# Altium PCB ZenDriver_Mini2.PcbDoc
Units mm, origin at the board's own origin, x right, y up, seen from the top; angles counter-clockwise.
Board outline 45.85 x 53.55 mm, 2 copper layers (Top Layer, Bottom Layer); 21 components, 23 nets, 94 pads, 116 vias.
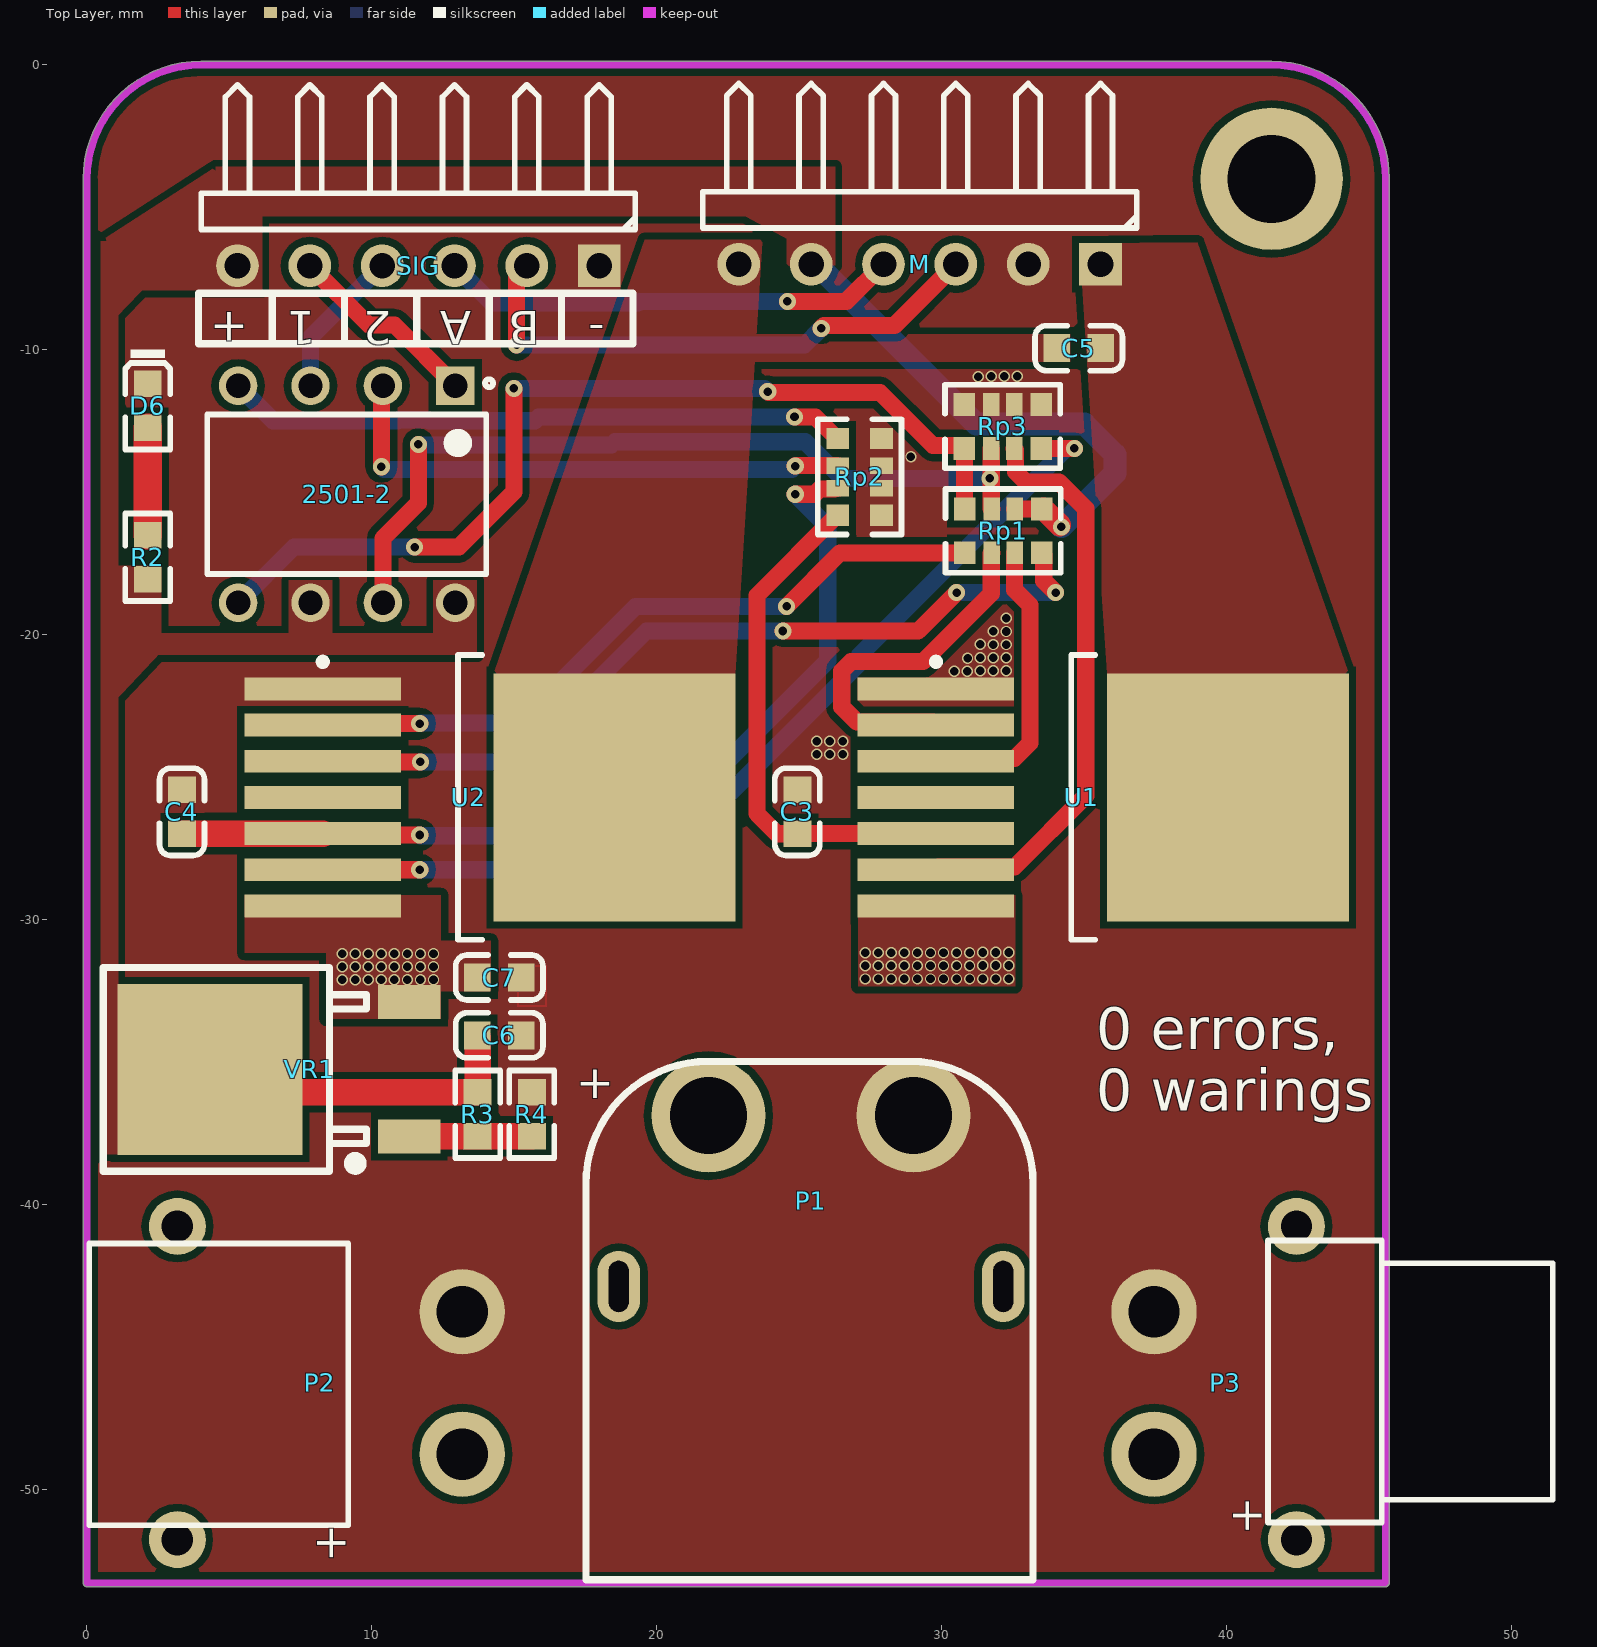
[diagram p0: Top Layer view]
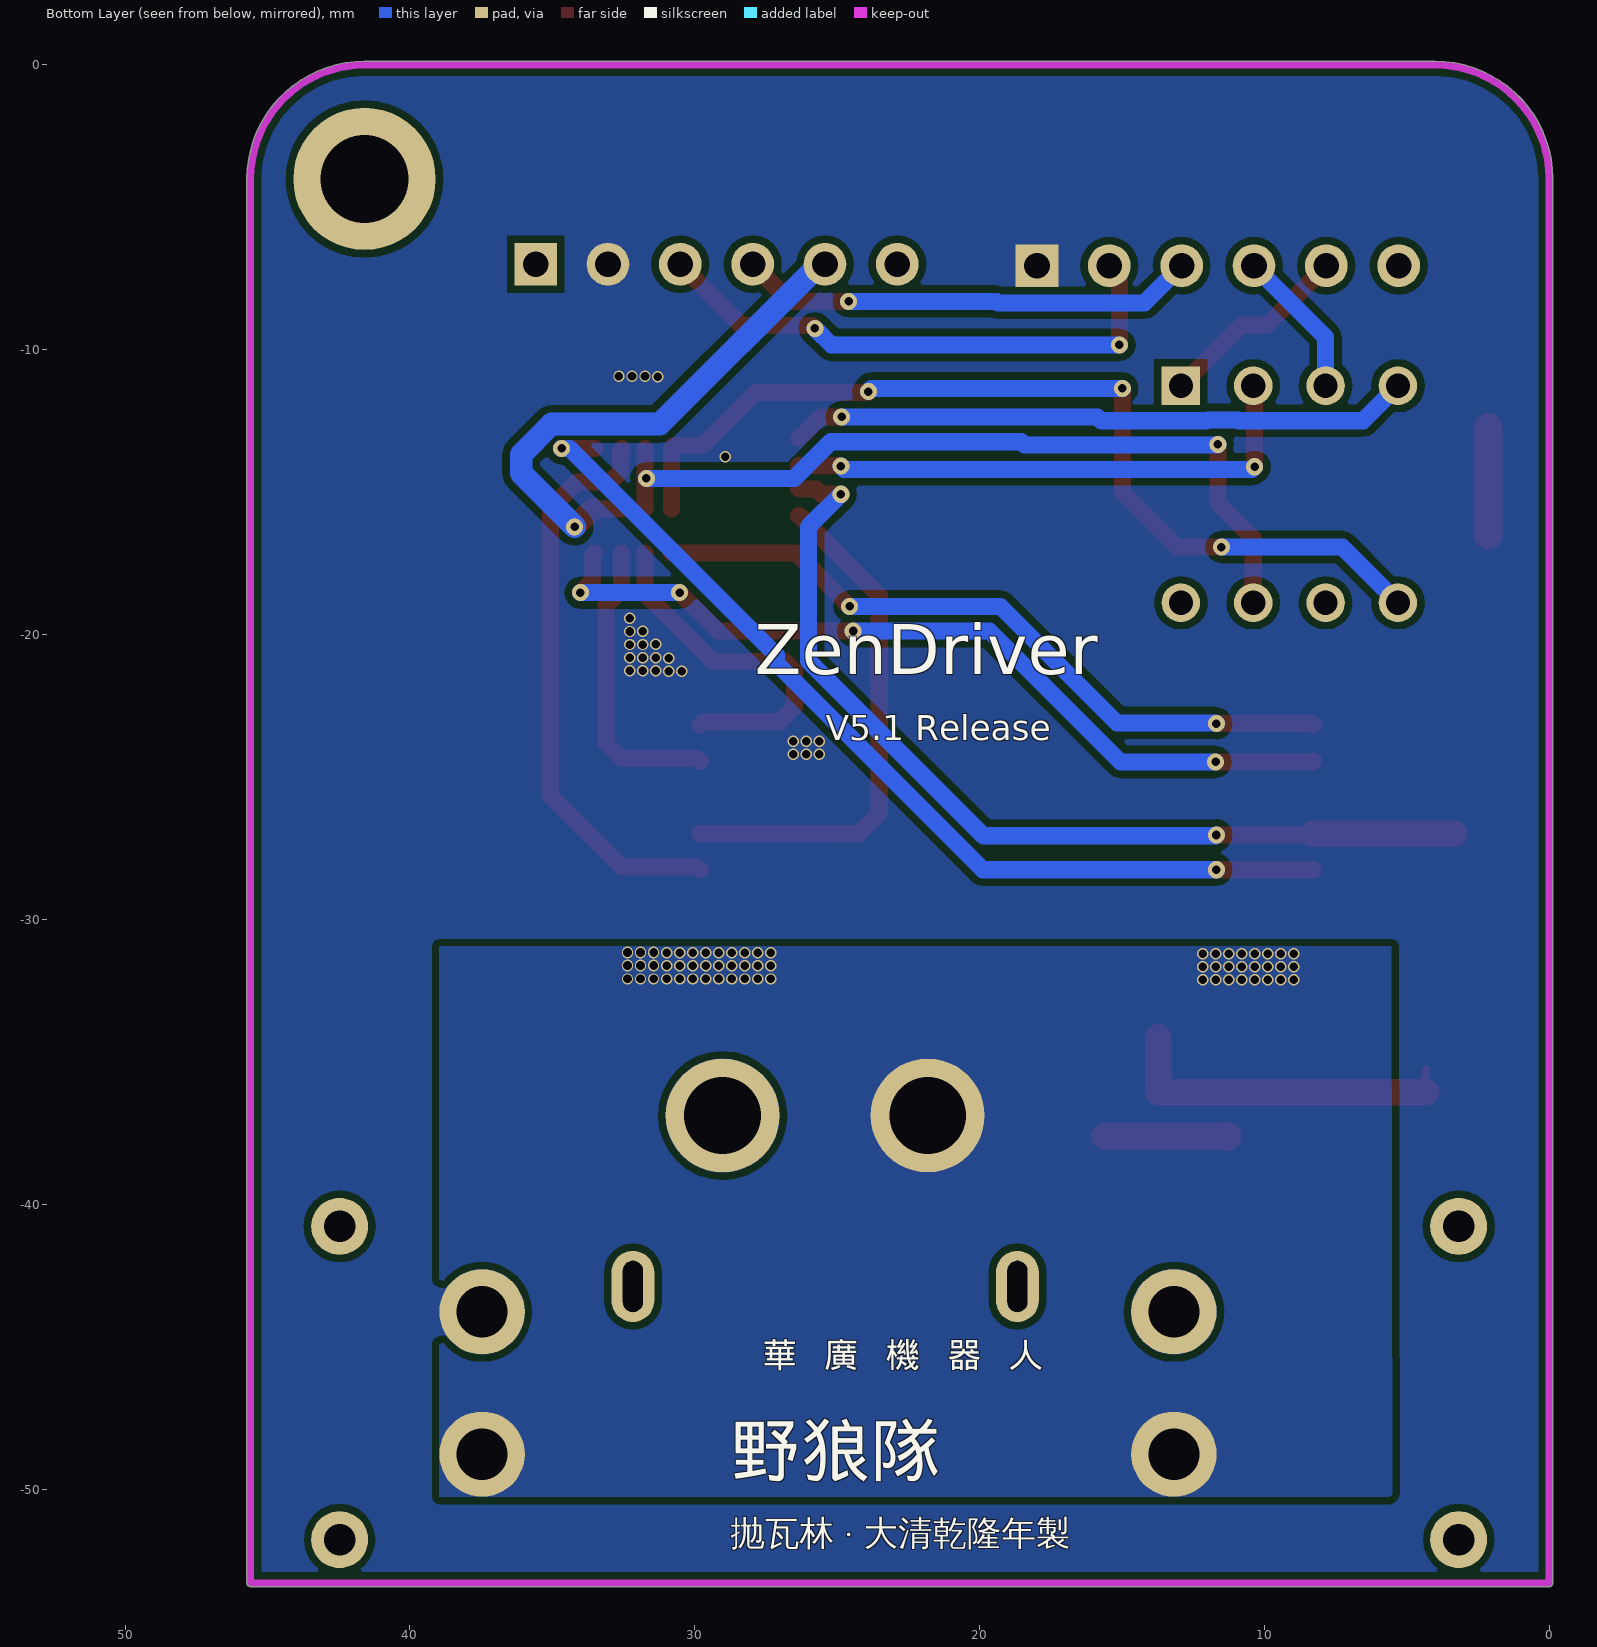
[diagram p1: Bottom Layer view, seen from below]
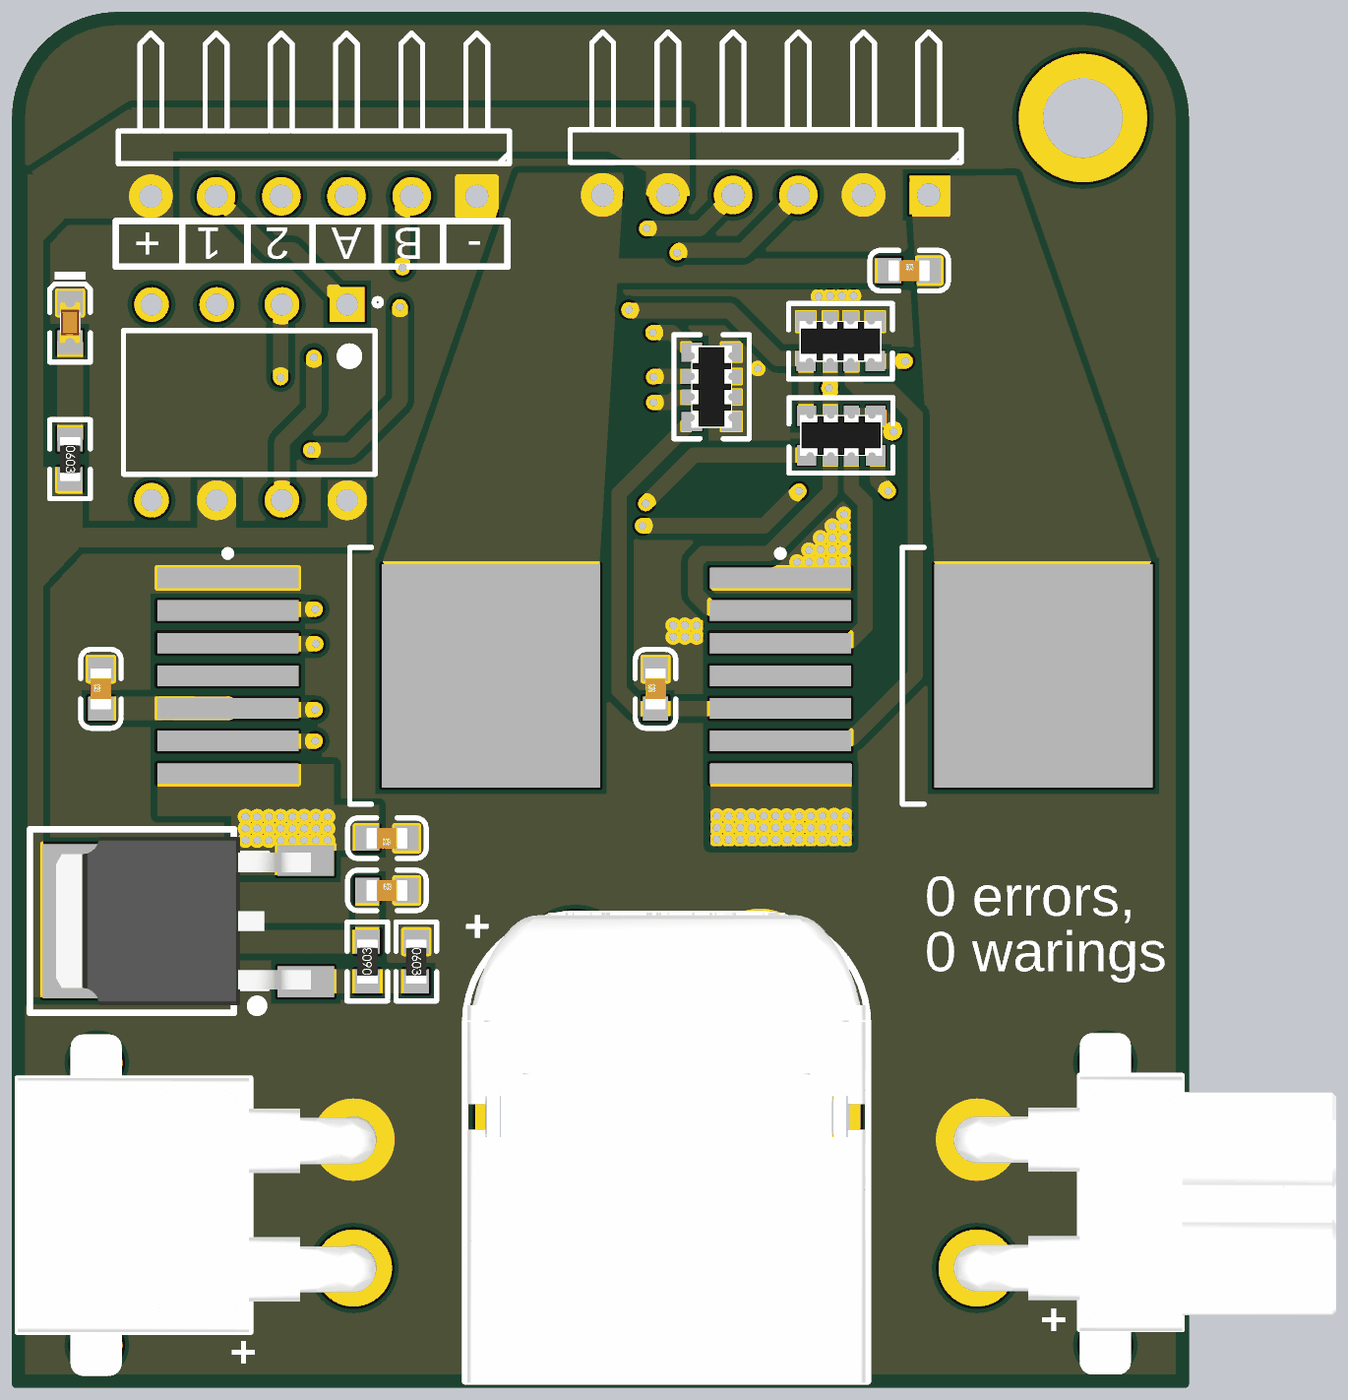
[diagram p2: 3D render of the assembled board from above, using the file's embedded part models]

## Layer stack, top to bottom
Top Solder: solder mask 0.0102, Solder Resist, Dk 3.5
Top Layer: signal copper 0.0356
Dielectric 1: dielectric 0.32, FR-4, Dk 4.8
Bottom Layer: signal copper 0.0356
Bottom Solder: solder mask 0.0102, Solder Resist, Dk 3.5

## Board outline
-0.127,-53.3 -0.127,-4 cw(c4,-4) 4,0.127 41.593,0.127 cw(c41.593,-4) 45.72,-3.999 cw(c45.593,-4) 45.72,-4 45.72,-53.3 cw(c45.593,-53.3) 45.593,-53.427 0,-53.427 cw(c0,-53.3)

## Design rules (kind name [scope] priority, off if disabled: settings)
Clearance [All] p1: gap=0.254 ignorepadtopadclearanceinfootprint=FALSE except(0: Arc-Hole Track-Hole SMDPad-Hole THPad-Hole Via-Hole Fill-Hole Poly-Hole Region-Hole Text-Hole)
PolygonConnect [All] p1: connectstyle=Direct reliefconductorwidth=0.254 reliefentries=4 polygonreliefangle="90 Angle" airgapwidth=0.254
RoutingVias [All] p1: holewidth=0.3 width=0.6 viastyle="Through Hole" minholewidth=0.3 minwidth=0.6 maxholewidth=0.3 maxwidth=0.6
SolderMaskExpansion [All] p1: expansion=0.102
Width M- [InNet('M-')] p1: maxlimit=2.032 minlimit=1.016 preferedwidth=2.032
Width M+ [InNet('M+')] p2: maxlimit=2.032 minlimit=1.016 preferedwidth=2.032
Width 5V [InNet('5VOUT')] p3: maxlimit=0.279 minlimit=0.279 preferedwidth=0.279
Width VCC [InNet('VCC')] p4: maxlimit=2.032 minlimit=1.016 preferedwidth=2.032
Width [InNetClass('buxian')] p5: maxlimit=0.279 minlimit=0.279 preferedwidth=0.279
30 further rules are at their usual default settings.

## Components (designator, comment, footprint, x,y, rotation, side; value= is the part's Value field where it differs from the comment)
2501-2 "2501-2" *DIP762W50P254L977H451Q8 9.119,-15.073 r270 top
C3 "100nF (104) 10% 50V" 0603_C 24.943,-26.224 r90 top
C4 "100nF (104) 10% 50V" 0603_C 3.334,-26.224 r90 top
C5 "22pF (220) 5% 50V" 0603_C 34.823,-9.942 r0 top
C6 "100nF (104) 10% 50V" 0603_C 14.478,-34.072 r0 top
C7 "100nF (104) 10% 50V" 0603_C 14.478,-32.04 r180 top
D6 "红灯 0603" 0603_LED_S1 2.134,-11.966 r270 top
M "Header 6H" HDR1X6H 35.585,-6.996 r180 top
P1 "XT60PW-M" XT60PW-M 29.019,-36.886 r180 top
P2 "XT30PW_M" XT30PW-M 13.175,-48.776 r90 top
P3 "XT30PW_F" XT30PW-F 37.465,-43.776 r270 top
R2 "470Ω (4700) ±1%" 0603_R 2.134,-17.283 r270 top
R3 "1KΩ (1001) ±1%" 0603_R 13.716,-36.841 r90 top
R4 "3KΩ (3001) ±1%" 0603_R 15.621,-36.841 r270 top
Rp1 "10KΩ (103) ±5%" 0603_Rx4 32.169,-16.359 r0 top
Rp2 "1KΩ (102) ±5%" 0603_Rx4 27.127,-14.463 r90 top
Rp3 "2KΩ (202) ±5%" 0603_Rx4 32.15,-12.693 r180 top
SIG "Header 6H" HDR1X6H 17.983,-7.047 r180 top
U1 "BTN7971" DPAK127P1615X127-8N 35.656,-25.716 r0 top
U2 "BTN7971" DPAK127P1615X127-8N 14.129,-25.716 r0 top
VR1 "LM317AL-TN3-R" TO-252-2-180 11.318,-35.266 r180 top

## Footprints (in the part's own frame and the unit in brackets; to place one, negate y for a bottom-side part, rotate by r counter-clockwise, add the part's x,y. Pads: shape width x height; smd on the part's side, far side on the other; paste and mask are expansions set on the pad)
0603_C [mm]
  rect 0.93x0.98 smd: 1(-0.77,0) 2(0.77,0)
  silkscreen extent -1.54,-0.79 1.54,0.79, body extent -0.8,-0.4 0.8,0.4, height 0.3
0603_LED_S1 [mm]
  rect 0.93x0.98 smd: A(0.77,0) K(-0.77,0)
  silkscreen extent -1.98,-0.79 1.54,0.79, body extent -0.8,-0.4 0.8,0.4, height 0.6
0603_R [mm]
  rect 0.93x0.98 smd: 1(-0.77,0) 2(0.77,0)
  silkscreen extent -1.53,-0.79 1.54,0.79, body extent -0.85,-0.4 0.85,0.4, height 0.56
0603_Rx4 [mm]
  rect 0.75x0.8 smd mask+0.051: 1(-1.35,-0.77) 4(1.35,-0.77) 5(1.35,0.77) 8(-1.35,0.77)
  rect 0.58x0.8 smd mask+0.051: 2(-0.4,-0.77) 3(0.4,-0.77) 6(0.4,0.77) 7(-0.4,0.77)
  silkscreen extent -2.02,-1.47 2.02,1.47, body extent -1.6,-0.8 1.6,0.8, height 0.55
*DIP762W50P254L977H451Q8 [mm]
  rect 1.35x1.35 hole 0.85: 1(-3.81,3.81)
  round 1.35 hole 0.85: 2(-3.81,1.27) 3(-3.81,-1.27) 4(-3.81,-3.81) 5(3.81,-3.81) 6(3.81,-1.27) 7(3.81,1.27) 8(3.81,3.81)
  silkscreen extent -4.04,-4.9 2.8,5.14
DPAK127P1615X127-8N [mm] "TO, 8-Pads, Body 7.23x8.36mm (max), IPC Medium Density"
  rect 5.5x0.8 smd: 1(-5.85,3.81) 2(-5.85,2.54) 3(-5.85,1.27) 4(-5.85,0) 5(-5.85,-1.27) 6(-5.85,-2.54) 7(-5.85,-3.81)
  rect 8.5x8.7 smd: 8(4.4,0)
  silkscreen extent -5.97,-5 -0.25,5, body extent -1.1,-5 7.15,5, height 1.27
HDR1X6H [mm] "Connector; Header; 6 Position; Right Angle"
  rect 1.5x1.5 hole 0.9: 1(0,0)
  round 1.5 hole 0.9: 2(2.54,0) 3(5.08,0) 4(7.62,0) 5(10.16,0) 6(12.7,0)
  silkscreen extent -1.27,-6.35 13.97,-1.27
TO-252-2-180 [mm] "180度编带包装"
  rect 2.2x1.2 smd: 1(0,2.361) 3(0.004,-2.361)
  rect 6.5x6 smd: 2(7,0)
  silkscreen extent 1.5,-3.57 10.75,3.57, body extent -0.2,-3.27 9.74,3.27, height 2.44
XT30PW-F [mm]
  round 2 hole 1.1: 0(-3,5) 0(8,5)
  round 3 hole 1.8: 1(5,0) 2(0,0)
  silkscreen extent -2.5,4 7.4,14, body extent -4.15,-0.9 9.15,14, height 5.1
XT30PW-M [mm]
  round 2 hole 1.1: 0(-3,10) 0(8,10)
  round 3 hole 1.8: 1(0,0) 2(5,0)
  silkscreen extent -2.5,4 7.4,13.1, body extent -4.2,-0.88 9.1,13.08, height 5.15
XT60PW-M [mm]
  oval 1.5x2.5 hole 0.7 slot 1.8 at 90 deg: 0(-3.15,6) 0(10.35,6)
  round 4 hole 2.7: 1(7.2,0) 2(0,0)
  silkscreen extent -4.2,-1.9 11.5,16.3, body extent -4.3,-1.95 11.6,16.35, height 8.45

## Part data
2501-2: library part "SW DIP-4", "DIP Switch, 4 Position, SPST", Code_IPC=SOIC127P600-8, Code_JEDEC=MS-012-AA, LatestRevisionDate=29-May-2009, LatestRevisionNote="IPC-7351 Footprint Added.", PackageDescription="8-Pin Small Outline Integrated Circuit 1.27 mm Pitch", PackageReference=SO8, PackageVersion=Dec-2002, Published=24-Mar-1999, Publisher="Altium Limited"
C3 C4 C6 C7: library part "0603 100nF (104) 10% 50V", "贴片电容", Package=0603, SuppliersPartNumber=C14663, ComponentLink1Description=供应, ComponentLink1URL=http://www.szlcsc.com/product/details_15331.html, Supplier=LC
C5: library part "0603 22pF (220) 5% 50V", "贴片电容", Package=0603, SuppliersPartNumber=C1653, ComponentLink1Description=供应, ComponentLink1URL=http://www.szlcsc.com/product/details_2005.html, Supplier=LC
D6: library part "0603 红灯", "发光二极管", Package=0603, SuppliersPartNumber=C2286, ComponentLink1Description=供应, ComponentLink1URL=http://www.szlcsc.com/product/details_2659.html, Supplier=LC
M SIG: "Header, 6-Pin, Right Angle", LatestRevisionDate=17-Jul-2002, LatestRevisionNote="Re-released for DXP Platform.", Publisher="Altium Limited"
P1: library part XT60, "XT60"
P2 P3: library part XT30, "XT30"
R2: library part "0603 470Ω (4700) 1%", "贴片电阻", Package=0603, SuppliersPartNumber=C23179, ComponentLink1Description=供应, ComponentLink1URL=http://www.szlcsc.com/product/details_23906.html, Supplier=LC
R3: library part "0603 1KΩ (1001) 1%", "贴片电阻", Package=0603, SuppliersPartNumber=C21190, ComponentLink1Description=供应, ComponentLink1URL=http://www.szlcsc.com/product/details_21904.html, Supplier=LC
R4: library part "0603 3KΩ (3001) 1%", "贴片电阻", Package=0603, SuppliersPartNumber=C4211, ComponentLink1Description=供应, ComponentLink1URL=http://www.szlcsc.com/product/details_4618.html, Supplier=LC
Rp1: library part "0603*4  10KΩ (103) 5%", "贴片排阻", Package=0603*4, SuppliersPartNumber=C29718, ComponentLink1Description=供应, ComponentLink1URL=http://www.szlcsc.com/product/details_30472.html, Supplier=LC
Rp2 Rp3: library part "0603*4  1KΩ (102) 5%", "贴片排阻", Package=0603*4, SuppliersPartNumber=C20197, ComponentLink1Description=供应, ComponentLink1URL=http://www.szlcsc.com/product/details_20907.html, Supplier=LC
VR1: library part "TO-252-2 LM317AL-TN3-R", "低压差线性稳压(LDO)", Package=TO-252-2, SuppliersPartNumber=C75510, ComponentLink1Description=供应, ComponentLink1URL=http://www.szlcsc.com/product/details_76635.html, Supplier=LC

## Free pads (board coordinates)
  round 5 hole 3.1: 2(41.593,-4)

## Via types
v1: diameter 0.4, hole 0.3, Top Layer to Bottom Layer, 94 vias
v2: diameter 0.6, hole 0.3, Top Layer to Bottom Layer, 22 vias

## Nets (pads, with @x,y where several pads share a name; then routed paths per layer and width w, separated by ;. In a path a pad name is that pad's centre, name@x,y a point inside that pad or via, vN(x,y) a via of type N, cw(c..) or ccw(c..) an arc to the next point about the centre after c; other vN are vias at no path point)
5VOUT: 2501-2.6 2501-2.8 C6.1 M.5 R2.2 R3.2 Rp1.5 Rp1.6 SIG.6 VR1.2 | length 30.8
  Top Layer w0.279: VR1.2@4.318,-36.071 VR1.2 ; Rp1.5 Rp1.5@33.587,-15.589 ; v2@34.152,-16.155 v2(34.214,-16.216)
  Top Layer w0.6: Rp1.6 Rp1.5
  Top Layer w0.8: Rp1.5@33.587,-15.589 v2@34.152,-16.155
  Top Layer w0.93: VR1.2@4.318,-36.071 R3.2 C6.1@13.716,-34.131
  Bottom Layer w0.8: M.5 25.613,-6.996 31.227,-12.609 35.025,-12.609 36.091,-13.676 36.091,-14.339 v2(34.214,-16.216)
A2: Rp1.2 U1.2 | length 12.6
  Top Layer w0.6: U1.2 29.706,-23.076 27.042,-23.076 26.502,-22.535 26.502,-21.276 26.826,-20.952 29.351,-20.952 31.75,-18.553 31.75,-17.148 Rp1.2
A3: Rp1.3 U1.3 | length 10.5
  Top Layer w0.6: U1.3 29.906,-24.346 32.569,-24.346 33.11,-23.805 33.11,-18.97 32.569,-18.429 Rp1.3
A5: C3.1 Rp2.8 U1.5 | length 18.2
  Top Layer w0.6: Rp2.8 26.332,-15.813 23.52,-18.625 23.52,-26.287 24.227,-26.994 C3.1 24.947,-26.99 29.802,-26.99 U1.5
A6: Rp3.7 U1.6 | length 20.3
  Top Layer w0.6: U1.6 29.906,-28.156 32.569,-28.156 35.068,-25.657 35.068,-15.579 34.123,-14.635 32.955,-14.635 32.604,-14.284 32.604,-13.517 Rp3.7
B2: Rp1.1 U2.2 | length 25
  Top Layer w0.6: U2.2 8.33,-23.125 v2(11.684,-23.125) ; v2(24.562,-19.01) 26.443,-17.129 Rp1.1
  Bottom Layer w0.6: v2(11.684,-23.125) 11.709,-23.099 15.177,-23.099 19.266,-19.01 v2(24.562,-19.01)
B3: Rp1.4 U2.3 | length 29.8
  Top Layer w0.6: U2.3 8.304,-24.471 v2(11.709,-24.471) ; v2(24.435,-19.874) 29.185,-19.874 v2(30.531,-18.527) ; Rp1.4 33.594,-17.204 33.594,-18.111 v2(34.011,-18.527)
  Bottom Layer w0.6: v2(11.709,-24.471) 15.05,-24.471 19.647,-19.874 v2(24.435,-19.874) ; v2(30.531,-18.527) v2(34.011,-18.527)
B5: C4.1 Rp2.7 U2.5 | length 33.2
  Top Layer w0.6: U2.5 8.33,-27.036 v2(11.684,-27.036) ; v2(24.867,-15.073) 25.539,-15.073 25.728,-14.884 26.246,-14.884 26.267,-14.863 Rp2.7
  Top Layer w0.93: C4.1 4.126,-26.994 4.134,-26.986 U2.5
  Bottom Layer w0.6: v2(11.684,-27.036) 11.709,-27.062 19.865,-27.062 26.01,-20.917 26.01,-16.216 v2(24.867,-15.073)
B6: Rp3.8 U2.6 | length 33.9
  Top Layer w0.6: U2.6 v2(11.684,-28.256) ; Rp3.8 v2(34.671,-13.463)
  Bottom Layer w0.6: v2(11.684,-28.256) 19.879,-28.256 27.133,-21.001 27.133,-20.718 34.387,-13.463 v2(34.671,-13.463)
ENCA: M.4 SIG.3 | length 16.2
  Top Layer w0.6: v2(24.593,-8.3) 26.661,-8.3 M.4
  Bottom Layer w0.6: SIG.3 14.207,-8.351 19.347,-8.351 19.398,-8.3 v2(24.593,-8.3)
ENCB: M.3 SIG.2 | length 19.5
  Top Layer w0.6: v2(15.088,-9.83) 15.088,-7.402 SIG.2 ; v2(25.781,-9.246) 25.873,-9.154 28.347,-9.154 M.3
  Bottom Layer w0.6: v2(15.088,-9.83) 25.197,-9.83 v2(25.781,-9.246)
GND: C3.2 C4.2 C6.2 C7.1 D6.K M.2 P1.2 P2.2 P3.2 R4.1 Rp2.1 Rp2.2 Rp2.3 Rp2.4 Rp3.1 Rp3.2 Rp3.3 Rp3.4 SIG.1 U1.1 U2.1
  other v1: 25.629,-24.206 26.086,-24.206 26.543,-24.206 25.629,-23.749 26.086,-23.749 26.543,-23.749 30.455,-21.285 30.912,-21.285 31.363,-21.263 31.821,-21.263 32.278,-21.263 30.917,-20.828 31.369,-20.806 31.821,-20.806 32.278,-20.806 31.369,-20.345 31.826,-20.349 32.278,-20.349 31.826,-19.888 32.283,-19.892 32.283,-19.431 28.931,-13.752 31.293,-10.946 31.744,-10.924 32.202,-10.924 32.659,-10.924
IN1: 2501-2.7 Rp1.7 Rp3.6 | length 28.9
  Top Layer w0.6: 2501-2.7 10.389,-16.623 11.633,-15.378 v2(11.633,-13.32) ; Rp3.6 31.75,-15.57 Rp1.7
  Bottom Layer w0.6: v2(11.633,-13.32) 11.645,-13.32 11.67,-13.346 18.419,-13.346 18.536,-13.228 25.22,-13.228 26.506,-14.514 v2(31.699,-14.514)
IN2: 2501-2.5 Rp1.8 Rp3.5 | length 33.8
  Top Layer w0.6: v2(11.506,-16.927) 13.056,-16.927 14.986,-14.997 v2(14.986,-11.354) ; v2(23.901,-11.466) 23.936,-11.501 27.844,-11.501 29.706,-13.363 30.725,-13.363 30.8,-13.438 Rp3.5 30.809,-13.473 30.809,-15.58 Rp1.8
  Bottom Layer w0.6: 2501-2.5 7.264,-16.927 v2(11.506,-16.927) ; v2(14.986,-11.354) 23.789,-11.354 v2(23.901,-11.466)
M+: C5.2 M.1 U1.8
M-: C5.1 M.6 U2.8
Net2501-2_1: 2501-2.1 SIG.5 | length 6.9
  Top Layer w0.6: SIG.5 9.906,-9.129 10.795,-9.129 2501-2.1
Net2501-2_2: 2501-2.2 Rp2.6 | length 19
  Top Layer w0.6: v2(10.338,-14.108) 10.338,-11.314 2501-2.2 ; v2(24.867,-14.082) 24.886,-14.063 Rp2.6
  Bottom Layer w0.6: v2(10.338,-14.108) 10.43,-14.2 24.749,-14.2 v2(24.867,-14.082)
Net2501-2_3: 2501-2.3 SIG.4 | length 5.3
  Bottom Layer w0.6: 2501-2.3 7.849,-9.561 SIG.4
Net2501-2_4: 2501-2.4 Rp2.5 | length 21.9
  Top Layer w0.6: v2(24.841,-12.355) 25.574,-12.355 26.332,-13.113 Rp2.5
  Bottom Layer w0.6: 2501-2.4 6.538,-12.492 10.898,-12.492 10.923,-12.466 11.999,-12.466 12.024,-12.492 15.722,-12.492 15.859,-12.355 v2(24.841,-12.355)
NetD6_A: D6.A R2.1 | length 3.8
  Top Layer w1: R2.1 D6.A
NetR3_1: R3.1 R4.2 VR1.1 | length 4.3
  Top Layer w0.93: VR1.1@11.318,-37.611 R3.1 R4.2
  Top Layer w1.016: VR1.1 VR1.1@11.318,-37.611
VCC: C7.2 P1.1 P2.1 P3.1 U1.7 U2.7 VR1.3
  other v1: 8.966,-32.116 9.423,-32.116 9.881,-32.116 10.338,-32.116 10.795,-32.116 11.252,-32.116 11.709,-32.116 12.167,-32.116 27.33,-32.091 27.788,-32.091 28.245,-32.091 28.702,-32.091 29.159,-32.091 29.616,-32.091 30.074,-32.091 30.531,-32.091 30.988,-32.091 31.445,-32.091 31.902,-32.091 32.36,-32.091 8.966,-31.659 9.423,-31.659 9.881,-31.659 10.338,-31.659 10.795,-31.659 11.252,-31.659 11.709,-31.659 12.167,-31.659 27.33,-31.634 27.788,-31.634 28.245,-31.634 28.702,-31.634 29.159,-31.634 29.616,-31.634 30.074,-31.634 30.531,-31.634 30.988,-31.634 31.445,-31.634 31.902,-31.634 32.36,-31.634 31.445,-31.616 31.902,-31.616 32.36,-31.616 8.966,-31.202 9.423,-31.202 9.881,-31.202 10.338,-31.202 10.795,-31.202 11.252,-31.202 11.709,-31.202 12.167,-31.202 27.33,-31.177 27.788,-31.177 28.245,-31.177 28.702,-31.177 29.159,-31.177 29.616,-31.177 30.074,-31.177 30.531,-31.177 30.988,-31.177 31.445,-31.177 31.902,-31.177 32.36,-31.177 31.445,-31.158 31.902,-31.158 31.902,-31.158 32.36,-31.158 32.36,-31.158
pads on no net: P1.0 P2.0 P3.0 U1.4 U2.4

## Polygon pours and split planes (outlines as drawn)
GND on Bottom Layer "GND_L02_P091" (solid, remove dead copper, pour order 91): 0,0 45.593,0 45.593,-53.3 0,-53.3
no net on Bottom Layer "NONET_L02_P088" (solid, remove dead copper, pour order 88): 2.007,-7.885
no net on Bottom Layer "NONET_L02_P084" (solid, remove dead copper, pour order 84): 0.483,-6.208
VCC on Bottom Layer "VCC_L02_P042" (solid, remove dead copper, pour order 42): 5.537,-30.999 5.537,-30.948 38.964,-30.948 38.964,-50.277 5.512,-50.277
no net on Bottom Layer "Bottom Layer-No Net 2" (solid, pour order 18): -49.911,1.056
no net on Bottom Layer "Bottom Layer-No Net" (solid, remove dead copper, pour order 10): -133.985,-37.095
5VOUT on Top Layer "5VOUT_L01_P101" (solid, pour order 101): 26.213,-6.98 26.213,-3.614 26.187,-3.589 26.162,-3.614 19.964,-3.614
5VOUT on Top Layer "5VOUT_L01_P099" (solid, pour order 99): 4.521,-3.581 4.699,-6.426 0.483,-6.183
5VOUT on Top Layer "5VOUT_L01_P097" (solid, remove dead copper, pour order 97): 26.267,-3.581 26.267,-7.032 24.562,-7.061 24.562,-3.581
5VOUT on Top Layer "5VOUT_L01_P095" (solid, remove dead copper, pour order 95): 4.521,-3.581 6.147,-3.581 6.147,-6.183 5.548,-6.782 4.521,-6.782
5VOUT on Top Layer "5VOUT_L01_P093" (solid, pour order 93): 26.267,-3.581 26.267,-5.309 4.521,-5.309 4.521,-3.581
GND on Top Layer "GND_L01_P089" (solid, remove dead copper, pour order 89): 0,0 45.593,0 45.593,-53.3 0,-53.3
5VOUT on Top Layer "5VOUT_L01_P086" (solid, pour order 86): 3.599,-6.183 0.508,-6.183 0.483,-6.208 0.508,-6.234 0.508,-9.394
5VOUT on Top Layer "5VOUT_L01_P082" (solid, remove dead copper, pour order 82): 6.147,-6.183 6.147,-7.91 0.483,-7.91 0.483,-6.183
5VOUT on Top Layer "5VOUT_L01_P080" (solid, remove dead copper, pour order 80): 2.616,-17.588 0.483,-17.588 0.483,-20.001 2.616,-20.001
M- on Top Layer "M-_L01_P076" (solid, remove dead copper, pour order 76): 34.519,-9.46 34.519,-10.425 22.784,-10.425 22.784,-9.46
5VOUT on Top Layer "5VOUT_L01_P074" (solid, remove dead copper, pour order 74): 12.167,-18.096 13.691,-18.096 13.691,-20.356 12.167,-20.356
5VOUT on Top Layer "5VOUT_L01_P072" (solid, remove dead copper, pour order 72): 7.087,-18.096 8.611,-18.096 8.611,-20.356 7.087,-20.356
M- on Top Layer "M-_L01_P070" (solid, remove dead copper, pour order 70): 14.275,-21.372 19.583,-6.132 23.724,-6.132 22.758,-21.372
M+ on Top Layer "M+_L01_P068" (solid, pour order 68): 35.814,-21.372 34.849,-6.259 38.989,-6.225 44.298,-21.372
5VOUT on Top Layer "5VOUT_L01_P066" (solid, pour order 66): 0.631,-18.188 0.631,-20.317 2.882,-20.296
5VOUT on Top Layer "5VOUT_L01_P062" (solid, pour order 62): 3.225,-19.95 0.559,-19.95 0.584,-22.769
5VOUT on Top Layer "5VOUT_L01_P058" (solid, pour order 58): 13.691,-19.95 13.691,-20.712 0.813,-20.712 0.813,-19.95
5VOUT on Top Layer "5VOUT_L01_P052" (solid, remove dead copper, pour order 52): 1.092,-38.238 1.092,-6.225 0.483,-6.225 0.483,-38.238
VCC on Top Layer "VCC_L01_P050" (solid, pour order 50): 16.104,-31.634 16.104,-33.056 15.138,-33.056 15.138,-31.634
VCC on Top Layer "VCC_L01_P048" (solid, pour order 48): 14.173,-30.745 12.421,-30.745 12.421,-32.523 14.173,-32.523
VCC on Top Layer "VCC_L01_P046" (solid, pour order 46): 12.421,-33.488 8.407,-33.488 8.407,-31.177 12.421,-31.177
no net on Top Layer "NONET_L01_P044" (solid, remove dead copper, pour order 44): 11.049,-31.177
VCC on Top Layer "VCC_L01_P038" (solid, pour order 38): 5.537,-29.145 5.537,-31.177 12.421,-31.177 12.421,-29.145
VCC on Top Layer "VCC_L01_P036" (solid, remove dead copper, pour order 36): 27.076,-29.145 27.076,-32.345 32.588,-32.345 32.588,-29.145
VCC on Top Layer "VCC_L01_P032" (solid, remove dead copper, pour order 32): 5.537,-30.999

## Keep-outs
Keep-Out Layer:
  lines w0.254: 0,-53.3 0,-4 cw(c4,-4) 4,0 41.593,0 cw(c41.593,-4) 45.593,-4 45.593,-53.3 0,-53.3

## Silkscreen, mask and mechanical layers (free items; w line width, h text height)
Top Overlay:
  lines w0.254: 6.502,-9.79 6.502,-8.012 ; 9.042,-9.79 9.042,-8.012 ; 11.582,-9.79 11.582,-8.012 ; 14.122,-9.79 14.122,-8.012 ; 16.662,-9.79 16.662,-8.012 ; 3.912,-9.79 19.173,-9.79 19.173,-8.012 3.912,-8.012 3.912,-9.79
  text "1" at 8.026,-8.266 h2 r180
  text "2" at 10.693,-8.266 h2 r180
  text "A" at 13.487,-8.266 h2 r180
  text "B" at 15.9,-8.266 h2 r180
  text "+" at 5.664,-8.291 h2 r180
  text "-" at 18.186,-8.393 h2 r180
  text "0 errors," at 35.433,-35.052 h2.5
  text "0 warings" at 35.433,-37.211 h2.5
Bottom Overlay:
  text "ZenDriver" at 27.889,-21.971 h3
  text "V5.1 Release" at 25.4,-24.003 h1.52
  text "華   廣   機   器   人" at 27.61,-46.025 h1.52
  text "野狼隊" at 28.702,-50.089 h3.05
  text "抛瓦林 · 大清乾隆年製" at 28.727,-52.273 h1.52

## Text inside footprints (layer, text, board x,y; h text height)
P1: Top Overlay "+" at 18.519,-34.886 h2 r180
P2: Top Overlay "+" at 9.475,-52.576 h2 r90
P3: Top Overlay "+" at 39.865,-50.276 h2 r270